# Altium PCB SmartHome V3.PcbDoc (part 3 of 3)
Units mil, origin at the board's own origin, x right, y up, seen from the top; angles counter-clockwise.
Board outline 9055.12 x 5905.51 mil, 2 copper layers (Top Layer, Bottom Layer); 247 components, 227 nets, 963 pads, 444 vias.
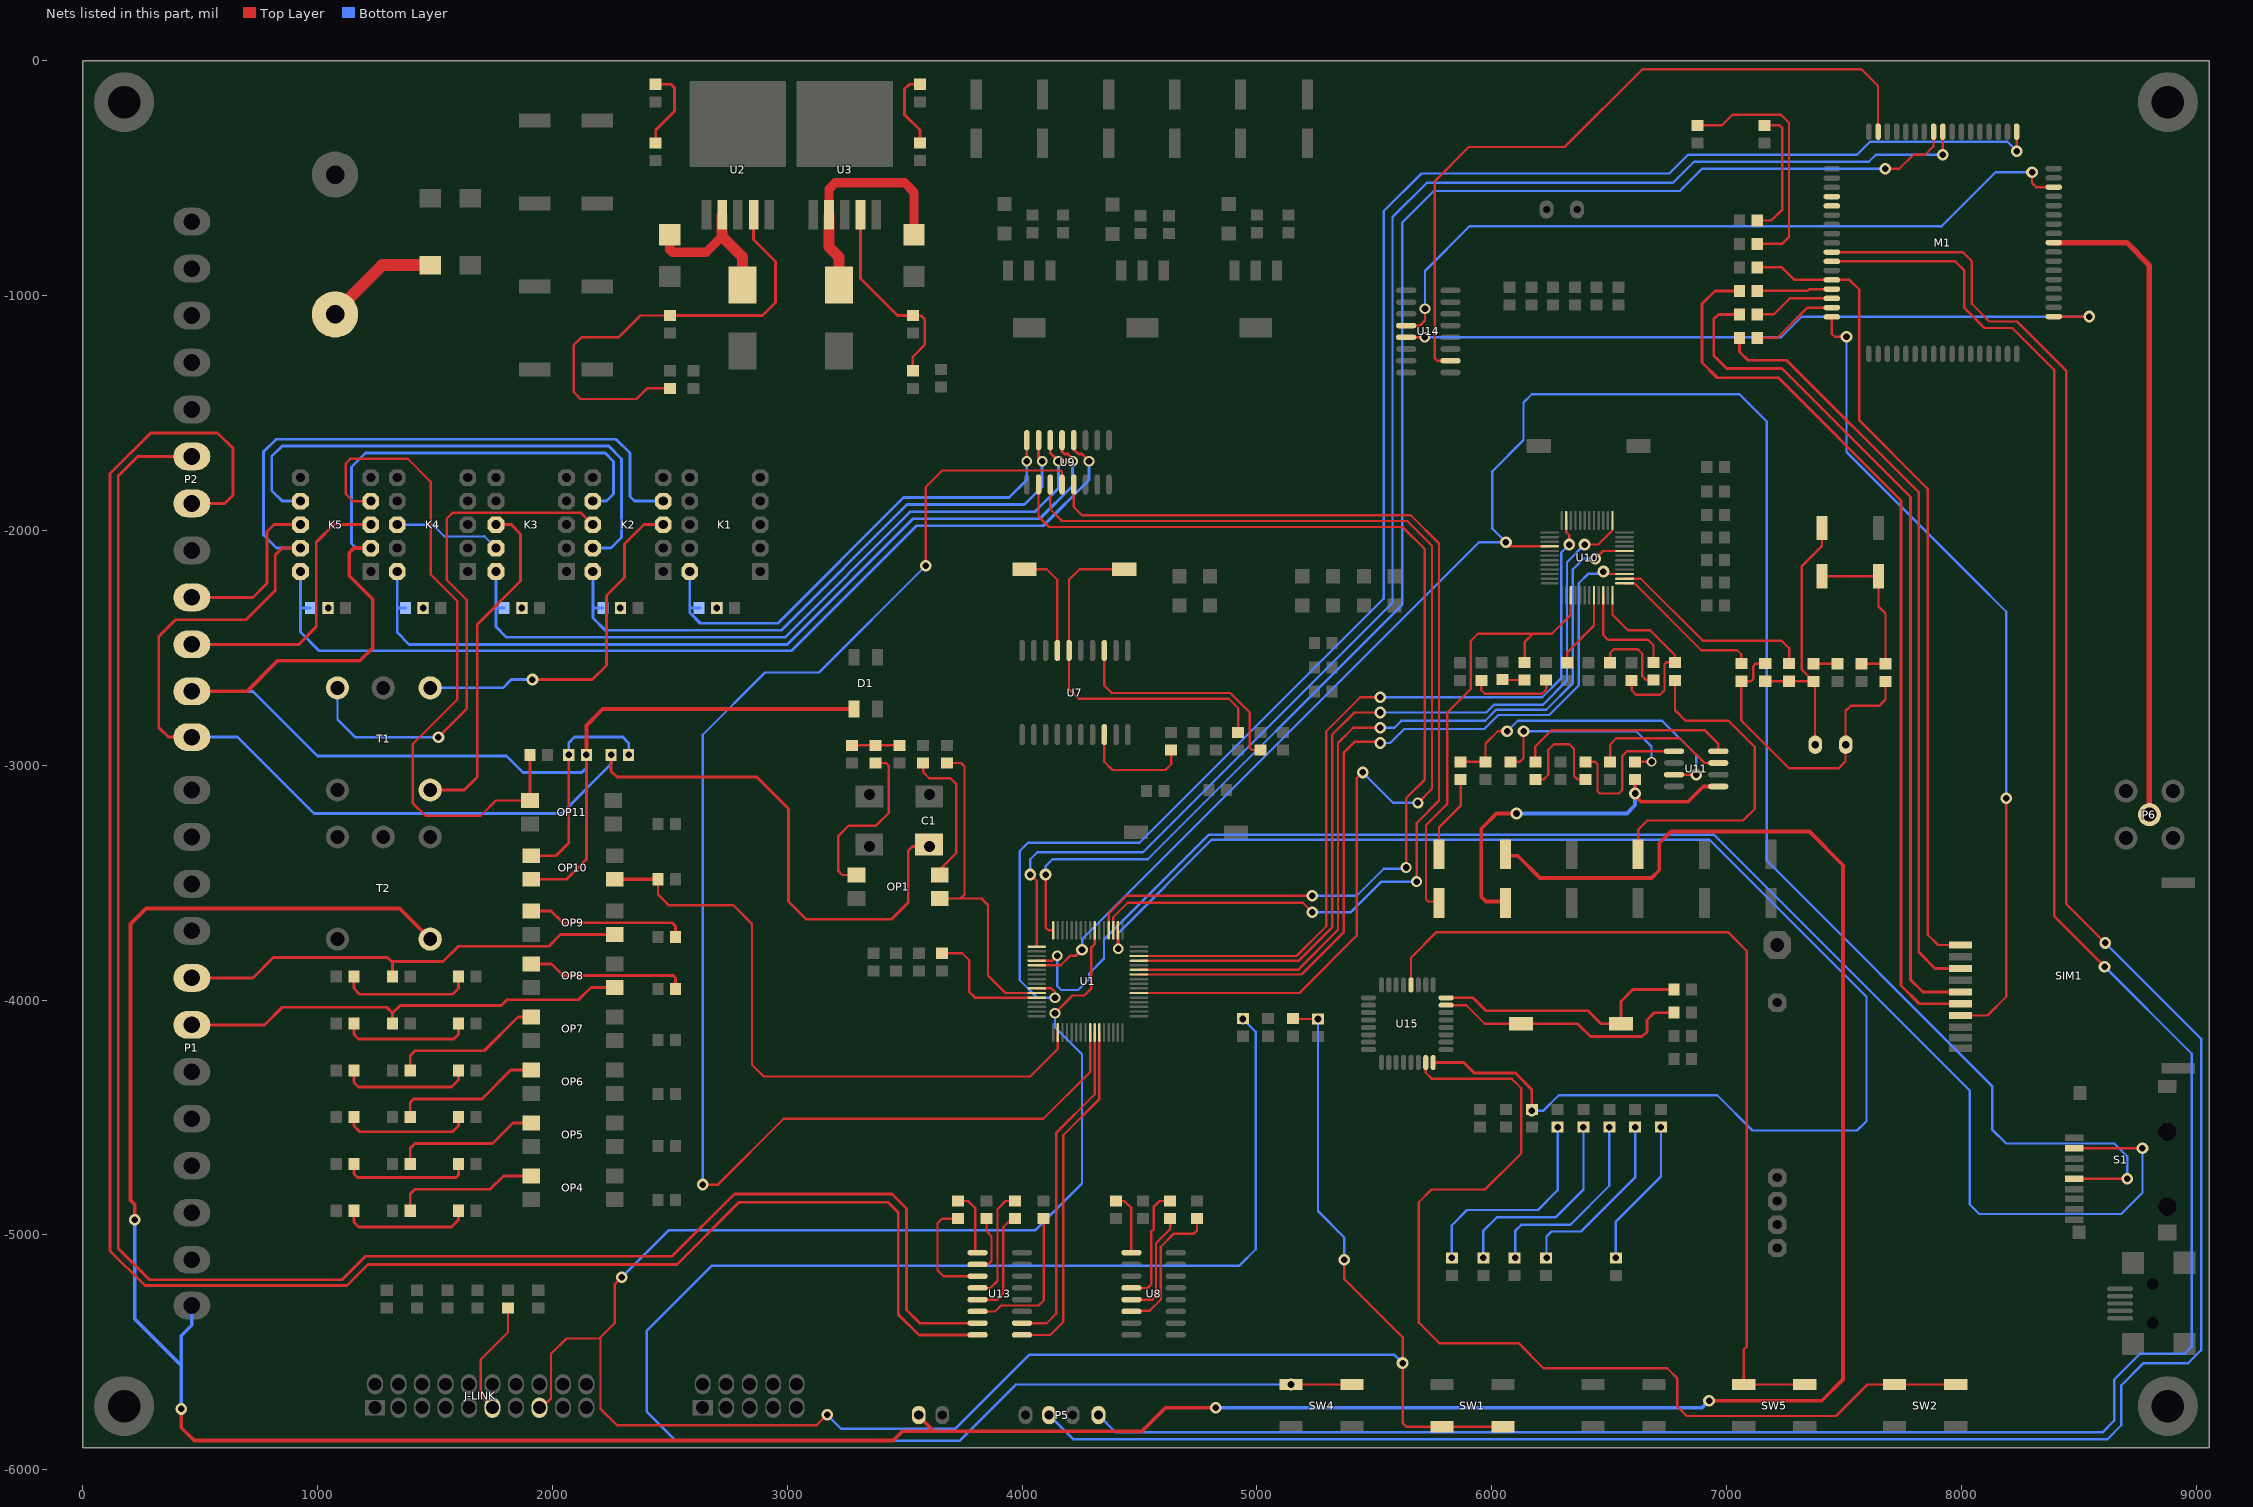
[diagram p3: the nets of this part, all layers, seen from the top]

## Via types
v1: diameter 50, hole 28, Top Layer to Bottom Layer, tented both sides, 187 vias
v2: diameter 47, hole 28, Top Layer to Bottom Layer, tented both sides, 130 vias
v3: diameter 42, hole 28, Top Layer to Bottom Layer, tented both sides, 79 vias
v4: diameter 45, hole 28, Top Layer to Bottom Layer, tented both sides, 29 vias
v5: diameter 46, hole 28, Top Layer to Bottom Layer, tented both sides, 10 vias
v6: diameter 47, hole 28, Top Layer to Bottom Layer, 4 vias
v7: diameter 35, hole 28, Top Layer to Bottom Layer, tented both sides, 3 vias
v8: diameter 48, hole 28, Top Layer to Bottom Layer, tented both sides, 1 vias
v9: diameter 44, hole 28, Top Layer to Bottom Layer, tented both sides, 1 vias

## Nets (pads, with @x,y where several pads share a name; then routed paths per layer and width w, separated by ;. In a path a pad name is that pad's centre, name@x,y a point inside that pad or via, vN(x,y) a via of type N, cw(c..) or ccw(c..) an arc to the next point about the centre after c; other vN are vias at no path point) (continued)
NetC34_2: C34.2 U8.1 | length 257.9
  Top Layer w10: C34.2@4400,-4855.51 4435,-4855.51 4465.24,-4885.76 U8.1@4465.24,-5065.93
NetC36_2: C36.2 R37.2 | length 1440.6
  Top Layer w10: C36.2@6622.8,-3385.51 6622.8,-3274.71 6662,-3235.51 7070,-3235.51 7120,-3185.51 7120,-2923.51 7007,-2810.51 6825,-2810.51 6780,-2765.51 R37.2@6780,-2637.28
NetC39_1: C39.1 R37.1 U10.48 | length 807.4
  Top Layer w10: U10.48@6513.82,-2276.69 6513.82,-2359.33 6580,-2425.51 6674,-2425.51 6780,-2531.51 6780,-2562.28 6743.23,-2562.28 6735,-2570.51 6735,-2680.51 6715,-2700.51 6615,-2700.51 6595.33,-2680.84 C39.1@6595.33,-2638.9
NetC43_2: C43.2 U10.44 | length 334.5
  Top Layer w10: C43.2@6320.9,-2563.9 6320.9,-2519.61 6435.08,-2405.43 U10.44@6435.08,-2276.69
NetC44_1: C44.1 R50.1 | length 372.7
  Top Layer w10: C44.1@5955,-2638.9 5955,-2680.51 5970,-2695.51 6215,-2695.51 6231.14,-2679.37 R50.1@6231.14,-2637.28
NetC45_1: C45.1 R51.1 | length 343.7
  Top Layer w10: C45.1@6504.06,-2563.9 6504.06,-2521.46 6520,-2505.51 6620,-2505.51 6640,-2525.51 6640,-2620.51 6656.77,-2637.28 R51.1@6688.52,-2637.28
NetC46_1: C46.1 R52.1 | length 91.6
  Top Layer w10: C46.1@6048.09,-2637.28 R52.1@6139.67,-2637.28
NetC47_2: C47.2 R53.1 | length 363.2
  Top Layer w10: C47.2@5775,-3385.51 5775,-3265.51 5867.21,-3173.3 R53.1@5867.21,-3060.51
NetC49_1: C49.1 R58.1 | length 466.1
  Top Layer w10: R58.1@6185,-3060.51 6220,-3060.51 6240,-3040.51 6240,-2935.51 6265,-2910.51 6330,-2910.51 6350,-2930.51 6350,-3045.51 6365,-3060.51 C49.1@6397.94,-3060.51
NetC49_2: C49.2 U11.1 | length 660.4
  Top Layer w10: C49.2@6397.94,-2985.51 6440,-2985.51 6450,-2995.51 6450,-3110.51 6460,-3120.51 6540,-3120.51 6555,-3105.51 6555,-2960.51 6575,-2940.51 U11.1@6775.51,-2940.51
NetC51_2: C51.2 U11.7 | length 588.8
  Top Layer w10: C51.2@6503.87,-2985.51 6503.87,-2911.64 6530,-2885.51 6800,-2885.51 6905,-2990.51 U11.7@6964.49,-2990.51
NetC52_1: C52.1 R63.1 | length 884.1
  Top Layer w10: R63.1@6079.07,-2985.51 6120,-2985.51 6135,-2970.51 v1(6135,-2855.51) ; C52.1@6610,-2985.51 v3(6680,-2985.51)
  Bottom Layer w10: v1(6135,-2855.51) 6615,-2855.51 6680,-2920.51 v3(6680,-2985.51)
NetC52_2: C52.2 C53.1 U11.5 | length 1655.5
  Top Layer w10: v1@6610,-3130.51 C52.2@6610,-3060.51
  Top Layer w16: C53.1@6034,-3580.51 5975,-3580.51 5955,-3560.51 5955,-3270.51 6020,-3205.51 v1(6105,-3205.51) ; C52.2@6610,-3060.51 v1(6610,-3120.51) 6610,-3130.51 6635,-3155.51 6835,-3155.51 6900,-3090.51 U11.5@6964.49,-3090.51
  Bottom Layer w16: v1(6105,-3205.51) 6575,-3205.51 6610,-3170.51 v1(6610,-3120.51)
NetC55_1: C55.1 U13.2 | length 265.2
  Top Layer w10: U13.2@3800.24,-5125.93 3854.58,-5125.93 3870,-5110.51 3870,-5005.51 3848.2,-4983.71 C55.1@3848.2,-4930.51
NetC56_1: C56.1 U13.3 | length 465.7
  Top Layer w10: C56.1@3726.6,-4930.51 3660,-4930.51 3640,-4950.51 3640,-5150.51 3665.42,-5175.93 U13.3@3800.24,-5175.93
NetC56_2: C56.2 U13.1 | length 276.3
  Top Layer w10: C56.2@3726.6,-4855.51 3770,-4855.51 3800.24,-4885.76 U13.1@3800.24,-5075.93
NetC57_2: C57.2 U13.6 | length 648.8
  Top Layer w9: U13.6@3810.51,-5325.51 3885,-5325.51 3910,-5300.51 4070,-5300.51 4091.6,-5278.91
  Top Layer w10: 4091.6,-5278.91 C57.2@4091.6,-4930.51
NetC58_1: C58.1 U13.4 | length 501.9
  Top Layer w10: U13.4@3800.24,-5225.93 3864.58,-5225.93 3895,-5195.51 3895,-4890.51 3930,-4855.51 C58.1@3970,-4855.51
NetC58_2: C58.2 U13.5 | length 478.6
  Top Layer w10: U13.5@3800.24,-5275.93 3894.58,-5275.93 3920,-5250.51 3920,-4967.51 3957,-4930.51 C58.2@3970,-4930.51
NetC61_1: C61.1 U15.7 X5.1 | length 1096.4
  Top Layer w10: U15.7@5805.35,-4021.77 5891.26,-4021.77 5970,-4100.51 X5.1@6115,-4100.51
  Top Layer w12: X5.1@6115,-4100.51 X5.1@6125,-4100.51 6365,-4100.51 6420,-4155.51 6640,-4155.51 6660,-4135.51 6660,-4085.51 6691.67,-4053.85 C61.1@6775,-4053.85
NetC62_1: C62.1 U15.8 X5.2 | length 1131.1
  Top Layer w12: U15.8@5805.35,-3990.28 5919.76,-3990.28 5975,-4045.51 6410,-4045.51 6465,-4100.51 X5.2@6550.2,-4100.51 6550.2,-4005.32 6600,-3955.51 C62.1@6775,-3955.51
NetC65_2: C65.2 U8.6 | length 604.6
  Top Layer w10: U8.6@4465.24,-5325.93 4468.66,-5322.51 4543,-5322.51 4590,-5275.51 4590,-5050.51 4645,-4995.51 4730,-4995.51 4745,-4980.51 C65.2@4745,-4930.51
NetC66_1: C66.1 U8.4 | length 505.7
  Top Layer w10: U8.4@4465.24,-5225.93 4534.58,-5225.93 4550,-5210.51 4550,-4985.51 4560,-4975.51 4560,-4880.51 4585,-4855.51 C66.1@4630.07,-4855.51
NetC66_2: C66.2 U8.5 | length 466
  Top Layer w10: U8.5@4465.24,-5275.93 4554.58,-5275.93 4570,-5260.51 4570,-5035.51 4630.07,-4975.45 C66.2@4630.07,-4930.51
NetC67_1: C67.1 C71.1 R80.1 R81.2 | length 726.7
  Top Layer w10: C67.1@7406,-2195.51 C71.1@7646,-2195.51 7646,-2324.51 7676,-2354.51 R80.1@7676,-2567.9 R81.2@7574.12,-2567.9
NetC67_2: C67.2 C68.2 C69.1 MIC.1@7377,-2912.51 R73.1 | length 1183.5
  Top Layer w10: C68.2@7164.08,-2642.51 C69.1@7265.76,-2642.51 R73.1@7369.97,-2642.51 ; MIC.1@7376,-2908.51 7376,-2648.54 R73.1@7370.36,-2642.9 R73.1@7369.97,-2642.51 ; C67.2@7406,-1990.51 7406,-2066.51 7319,-2153.51 7319,-2591.54 R73.1@7369.97,-2642.51
NetC68_1: C68.1 C70.1 MIC.2@7507,-2912.51 R80.2 | length 1355.8
  Top Layer w10: C68.1@7164.08,-2567.51 7123,-2567.51 7113,-2577.51 7113,-2633.51 7104,-2642.51 C70.1@7062,-2642.51 7062,-2809.51 7266,-3013.51 7476,-3013.51 7506,-2983.51 7506,-2908.51 7506,-2769.51 7528,-2747.51 7649,-2747.51 7676,-2720.51 R80.2@7676,-2642.9
NetC69_2: C69.2 U10.2 | length 888.8
  Top Layer w10: U10.2@6565,-2205.83 6634.31,-2205.83 6898.5,-2470.01 7233.5,-2470.01 7265.76,-2502.27 C69.2@7265.76,-2567.51
NetC70_2: C70.2 U10.1 | length 662.1
  Top Layer w10: U10.1@6565,-2225.51 6607,-2225.51 6892,-2510.51 7045,-2510.51 7062,-2527.51 C70.2@7062,-2567.51
NetD2_1: D2.1 F1.2 | length 497.8
  Top Layer w50: F1.2@1075,-1080.51 1075,-1070.51 1275,-870.51 D2.1@1480,-870.51
NetD4_2: D4.2 R25.1
  other v4: 2700,-2330.51
NetD5_2: D5.2 L4.1 U2.2 | length 653.7
  Top Layer w39.37: D5.2@2500,-741.93 2500,-805.51 2510,-815.51 2655,-815.51 2723.07,-747.44
  Top Layer w47.24: U2.2@2723.07,-656.81 2723.07,-747.44 2723.07,-748.58 2810,-835.51 L4.1@2810,-955.51
NetD6_2: D6.2 L5.1 U3.2 | length 996.5
  Top Layer w39.37: U3.2@3178.07,-656.81 3178.07,-547.44 3205,-520.51 3500,-520.51 3540,-560.51 D6.2@3540,-741.93
  Top Layer w47.24: U3.2@3178.07,-656.81 3178.07,-793.58 3220,-835.51 L5.1@3220,-955.51
NetD7_2: D7.2 R38.1
  other v4: 2290,-2330.51
NetD8_2: D8.2 R12.1 | length 354.4
  Top Layer w12: R12.1@2440,-350.51 2440,-295.51 2520,-215.51 2520,-115.51 2505,-100.51 D8.2@2440,-100.51
NetD9_2: D9.2 R13.1 | length 330.2
  Top Layer w12: R13.1@3565,-350.51 3565,-295.51 3500,-230.51 3500,-120.51 3520,-100.51 D9.2@3565,-100.51
NetD10_1: D10.1 R22.2 | length 916
  Bottom Layer w10: v2@5830,-5093.51 5830,-4958.51 5894.51,-4894 6196,-4894 6280,-4810 v3(6280,-4540.51)
  other v2: 5830,-5097.51
NetD11_1: D11.1 R21.2 | length 879.2
  Bottom Layer w10: v2(5964,-5096.51) 5964,-4981.51 6020.51,-4925 6271,-4925 6390,-4806 v3(6390,-4540.51)
NetD12_1: D12.1 R18.2 | length 844.9
  Bottom Layer w10: v2(6099,-5097.51) 6099,-4983.51 6125.51,-4957 6333.51,-4957 6500,-4790.51 v3(6500,-4540.51)
NetD13_1: D13.1 R20.2 | length 787
  Bottom Layer w10: v2(6233,-5097.51) 6233,-5006.51 6254,-4985.51 6380,-4985.51 6610,-4755.51 v3(6610,-4540.51)
NetD14_1: D14.1 R74.2 | length 638.9
  Bottom Layer w10: v2@6527,-5099.51 6527,-4944.51 6720,-4751.51 v3(6720,-4540.51)
  other v2: 6528,-5097.51
NetD15_2: D15.2 R39.1
  other v4: 1870,-2330.51
NetD16_2: D16.2 R44.1
  other v4: 1450,-2330.51
NetD17_2: D17.2 R66.1 | length 565.7
  Top Layer w12: D17.2@1155,-3900.51 1155,-3950.51 1180,-3975.51 1575,-3975.51 1600,-3950.51 R66.1@1600,-3900.51
NetD18_2: D18.2 R67.1 | length 558.6
  Top Layer w12: D18.2@1155,-4299.08 1155,-4350.51 1175,-4370.51 1570,-4370.51 1600,-4340.51 R67.1@1600,-4299.08
NetD19_2: D19.2 R68.1 | length 553
  Top Layer w12: D19.2@1155,-4099.8 1155,-4145.51 1175,-4165.51 1580,-4165.51 1600,-4145.51 R68.1@1600,-4099.8
NetD20_2: D20.2 R69.1 | length 540
  Top Layer w12: D20.2@1155,-4498.37 1155,-4535.51 1180,-4560.51 1575,-4560.51 1600,-4535.51 R69.1@1600,-4498.37
NetD21_2: D21.2 R70.1 | length 546.1
  Top Layer w12: D21.2@1155,-4697.65 1155,-4740.51 1170,-4755.51 1590,-4755.51 1600,-4745.51 R70.1@1600,-4697.65
NetD22_2: D22.2 R71.1 | length 552.9
  Top Layer w12: D22.2@1155,-4896.94 1155,-4945.51 1175,-4965.51 1570,-4965.51 1600,-4935.51 R71.1@1600,-4896.94
NetD23_2: D23.2 R45.1
  other v4: 1045,-2330.51
NetK2_3: K2.3 T1.3 | length 1538.1
  Top Layer w12: v1(1915,-2635.51) 2170,-2635.51 2230,-2575.51 2230,-2277.51 2307,-2200.51 2307,-2058.51 2390,-1975.51 K2.3@2472.5,-1975.51
  Bottom Layer w12: T1.3@1480,-2670.51 1790,-2670.51 1825,-2635.51 v1(1915,-2635.51)
NetK2_7: K2.7 K5.9 | length 2293.7
  Bottom Layer w12: K5.9@927.5,-1875.51 850,-1875.51 805,-1830.51 805,-1685.51 850,-1640.51 2240,-1640.51 2295,-1695.51 2295,-2030.51 2250,-2075.51 K2.7@2172.5,-2075.51
NetK2_8: K2.8 T1.4 | length 2264.5
  Top Layer w10: v1(1515,-2880.51) 1635,-2760.51 1635,-2295.51 1550,-2210.51 1550,-1950.51 1575,-1925.51 2122.5,-1925.51 K2.8@2172.5,-1975.51
  Bottom Layer w10: T1.4@1085,-2670.51 1085,-2805.51 1160,-2880.51 v1(1515,-2880.51)
NetK3_7: K3.7 K4.8 | length 461.4
  Bottom Layer w9: 1540,-2025.51 1710,-2025.51
  Bottom Layer w10: K4.8@1340,-1975.51 1490,-1975.51 1540,-2025.51 ; 1710,-2025.51 K3.7@1760,-2075.51
NetK3_8: K3.8 T1.1 | length 1456
  Top Layer w12: T1.1@1480,-3105.51 1625,-3105.51 1680,-3050.51 1680,-2400.51 1865,-2215.51 1865,-2015.51 1825,-1975.51 K3.8@1760,-1975.51
NetK5_2: K5.2 OP11.1 R78.1 | length 2898
  Top Layer w10: K5.2@1227.5,-1875.51 1150,-1875.51 1120,-1845.51 1120,-1715.51 1140,-1695.51 1384,-1695.51 1482,-1793.51 1482,-2187.51 1595,-2300.51 1595,-2720.51 1405,-2910.51 1405,-3160.51 1460,-3215.51 1695,-3215.51 1760,-3150.51 OP11.1@1905,-3150.51
  Top Layer w12: OP11.1@1905,-3150.51 R78.1@1905,-2955.51
NetNETLIGHT_2: NETLIGHT.2 R65.1 | length 1056.1
  Top Layer w10: NETLIGHT.2@6875,-275.51 6980,-275.51 7025,-230.51 7230.51,-230.51 7265,-265 7265,-751 7235.49,-780.51 R65.1@7130,-780.51
NetOP1_1: OP1.1 R3.2 | length 750
  Top Layer w10: OP1.1@3295,-3467.66 3234.65,-3467.66 3218,-3451 3218,-3301 3262,-3257 3378,-3257 3432,-3203 3432,-3002 3420.51,-2990.51 R3.2@3376.25,-2990.51
NetOP1_4: OP1.4 R4.1 | length 616.8
  Top Layer w10: R4.1@3578.75,-2990.51 3578.75,-3029.26 3605,-3055.51 3695.51,-3055.51 3719,-3079 3719,-3375 3650,-3444 OP1.4@3650,-3467.66
NetOP4_1: OP4.1 R46.2 | length 618.1
  Top Layer w12: R46.2@1395,-4896.94 1395,-4825.51 1415,-4805.51 1735,-4805.51 1791.43,-4749.08 OP4.1@1910,-4749.08
NetOP5_1: OP5.1 R47.2 | length 626.5
  Top Layer w12: R47.2@1395,-4697.65 1395,-4630.51 1415,-4610.51 1745,-4610.51 1832.14,-4523.37 OP5.1@1910,-4523.37
NetOP6_1: OP6.1 R48.2 | length 635
  Top Layer w12: R48.2@1395,-4498.37 1395,-4435.51 1410,-4420.51 1700,-4420.51 1822.86,-4297.66 OP6.1@1910,-4297.66
NetOP7_1: OP7.1 R49.2 | length 646.3
  Top Layer w12: R49.2@1395,-4299.08 1395,-4235.51 1415,-4215.51 1710,-4215.51 1853.57,-4071.94 OP7.1@1910,-4071.94
NetOP8_1: OP8.1 R56.1 | length 687.4
  Top Layer w12: OP8.1@1910,-3846.23 1995.71,-3846.23 2045,-3895.51 2515,-3895.51 2525,-3905.51 R56.1@2525,-3953.37
NetOP9_1: OP9.1 R57.1 | length 686.9
  Top Layer w12: OP9.1@1910,-3620.51 1995,-3620.51 2045,-3670.51 2510,-3670.51 2525,-3685.51 R57.1@2525,-3730.51
NetOP10_1: OP10.1 R26.1 R76.1 | length 933.5
  Top Layer w12: OP10.1@1910,-3385.51 2015,-3385.51 2070,-3330.51 v4(2070,-2955.51)
  Bottom Layer w12: v4(2070,-2955.51) 2070,-2905.51 2095,-2880.51 2300,-2880.51 2325,-2905.51 v5(2325,-2955.51)
NetR1_2: R1.2 R2.1 R3.1 | length 202.5
  Top Layer w10: R2.1@3275,-2915.51 R3.1@3376.25,-2915.51 R1.2@3477.5,-2915.51
NetR8_2: R8.2 R9.1 U2.4 | length 1985.9
  Top Layer w10: R9.1@2500,-1395.51 2403,-1395.51 2358,-1440.51 2120,-1440.51 2091,-1411.51 2091,-1211.51 2124,-1178.51 2282,-1178.51 2375,-1085.51 R8.2@2500,-1085.51
  Top Layer w12: R8.2@2500,-1085.51 2895,-1085.51 2950,-1030.51 2950,-855.51 2856.93,-762.44 U2.4@2856.93,-656.81
NetR10_2: R10.2 R11.1 U3.4 | length 856.1
  Top Layer w10: R11.1@3535,-1320.51 3535,-1260.51 3585,-1210.51 3585,-1100.51 3570,-1085.51 R10.2@3535,-1085.51
  Top Layer w12: U3.4@3311.93,-656.81 3311.93,-927.44 3470,-1085.51 R10.2@3535,-1085.51
NetR15_2: R15.2 U7.6 X1.1 | length 1575.8
  Top Layer w10: X1.1@4435,-2165.51 4245,-2165.51 4200,-2210.51 U7.6@4200,-2511.38 4200,-2675.51 4241.38,-2716.89 4879.69,-2716.89 4920,-2757.2 R15.2@4920,-2860.51
NetR16_1: R16.1 U7.3 | length 1015.4
  Top Layer w10: U7.3@4350,-2511.38 4350,-2660.51 4381.81,-2692.32 4885.97,-2692.32 4970,-2776.36 4970,-2925.51 4980,-2935.51 R16.1@5015,-2935.51
NetR17_2: R17.2 U1.28 | length 559.8
  Top Layer w10: R17.2@3660,-3800.51 3745,-3800.51 3775,-3830.51 3775,-3965.51 3798.9,-3989.41 U1.28@4062.48,-3989.41
NetR19_1: R19.1 SW4.2 | length 7237.3
  Top Layer w10: v1(5145,-5636.61) SW4.2@5405,-5636.61
  Bottom Layer w10: v2(4940,-4080.51) 4995,-4135.51 4995,-5060.51 4925,-5130.51 2680,-5130.51 2401.38,-5409.13 2401.38,-5751.89 2525,-5875.51 3735,-5875.51 3973.9,-5636.61 v1(5145,-5636.61)
NetR23_2: R23.2 U7.18 | length 485.7
  Top Layer w10: U7.18@4350,-2869.65 4350,-2985.51 4385,-3020.51 4610,-3020.51 4635,-2995.51 R23.2@4635,-2935.51
NetR51_2: R51.2 U10.46 | length 473.8
  Top Layer w10: U10.46@6474.45,-2276.69 6474.45,-2444.96 6495,-2465.51 6665,-2465.51 6688.52,-2489.03 R51.2@6688.52,-2562.28
NetR53_2: R53.2 R54.1 U11.3 | length 1360.6
  Top Layer w10: R53.2@5867.21,-2985.51 R54.1@5973.14,-2985.51 5973.14,-2907.37 6025,-2855.51 v1(6065,-2855.51) ; U11.3@6775.51,-3040.51 v1(6870,-3040.51)
  Bottom Layer w10: v1(6065,-2855.51) 6110,-2810.51 6725,-2810.51 6870,-2955.51 v1(6870,-3040.51)
NetR55_1: R55.1 SIM1.6 | length 3873.2
  Top Layer w12: R55.1@7055,-980.51 6950,-980.51 6895,-1035.51 6895,-1285.51 6960,-1350.51 7220,-1350.51 7742,-1872.51 7742,-3937.51 7820,-4015.51 SIM1.6@7995,-4015.51
NetR58_2: R58.2 U11.8 | length 928.6
  Top Layer w10: R58.2@6185,-2985.51 6185,-2920.51 6255,-2850.51 6905,-2850.51 6964.49,-2910 U11.8@6964.49,-2940.51
NetR59_2: R59.2 SIM1.5 | length 3649.6
  Top Layer w12: R59.2@7055,-1080.51 6965,-1080.51 6945,-1100.51 6945,-1255.51 7000,-1310.51 7235,-1310.51 7783,-1858.51 7783,-3913.51 7835,-3965.51 SIM1.5@7995,-3965.51
NetR60_2: R60.2 SIM1.3 | length 3234.3
  Top Layer w12: R60.2@7055,-1180.51 7055,-1240.51 7090,-1275.51 7255,-1275.51 7818,-1838.51 7818,-3796.51 7887,-3865.51 SIM1.3@7995,-3865.51
NetR64_1: R64.1 STATUS.2 | length 554.4
  Top Layer w10: R64.1@7130,-680.51 7190,-680.51 7237,-633.51 7237,-287.51 7225,-275.51 STATUS.2@7160,-275.51
NetR72_1: R72.1 R73.2 | length 101.9
  Top Layer w10: R73.2@7370.36,-2567.9 R72.1@7472.24,-2567.9
NetU7_7: U7.7 X1.2 | length 459.7
  Top Layer w10: X1.2@4009.8,-2165.51 4105,-2165.51 4150,-2210.51 U7.7@4150,-2511.38
NRST: C30.1 J-LINK.15 R75.1 SW1.1 U1.7 | length 10567.8
  Top Layer w10: J-LINK.15@1945,-5735.51 1955,-5735.51 1994.48,-5696.03 1994.48,-5506.03 2060,-5440.51 2200,-5440.51 2265,-5375.51 ; v1(2295,-5180.51) 2265,-5210.51 2265,-5375.51 ; v1(3170,-5765.51) 3125,-5810.51 2275,-5810.51 2205,-5740.51 2205,-5435.51 2265,-5375.51 ; v4(4140,-4055.51) 4215,-3980.51 4265,-3980.51 4295,-3950.51 4295,-3775.51 4309.53,-3760.98 U1.7@4309.53,-3702.99 ; R75.1@5155.96,-4080.51 v2(5260,-4080.51) ; v1(5372,-5105.51) 5372,-5187.51 5620,-5435.51 v1(5620,-5545.51) 5620,-5800.51 5636.1,-5816.61 SW1.1@5787.5,-5816.61 SW1.1@6047.5,-5816.61
  Bottom Layer w10: v1(2295,-5180.51) 2495,-4980.51 4055,-4980.51 4255,-4780.51 4255,-4230.51 4140,-4115.51 v4(4140,-4055.51) ; v1(3170,-5765.51) 3230,-5825.51 3715,-5825.51 4030,-5510.51 5585,-5510.51 v1(5620,-5545.51) ; v2(5260,-4080.51) 5260,-4898.51 5372,-5010.51 v1(5372,-5105.51)
ON_OFF: SW2.1 U15.31 | length 4365.1
  Top Layer w10: 5718.74,-4309.25 5745,-4335.51 6085,-4335.51 6125,-4375.51 6125,-4652.51 5971,-4806.51 5743.28,-4806.51 5689,-4860.8 5689,-5373.23 5776.28,-5460.51 6113.28,-5460.51 6220.28,-5567.51 6747,-5567.51 6790,-5610.51 6790,-5730.51 6830,-5770.51 7465,-5770.51 7598.9,-5636.61 SW2.1@7715,-5636.61 SW2.1@7975,-5636.61
  Top Layer w12: 5718.74,-4309.25 U15.31@5718.74,-4265.87
OUT_Q1: OP9.3 P1.5 R62.2 | length 1957.8
  Top Layer w12: P1.5@465,-3905.51 725,-3905.51 812,-3818.51 1298,-3818.51 1315,-3835.51 ; R62.2@1320,-3900.51 1320,-3840.51 1315,-3835.51 ; OP9.3@2265,-3720.51 2035,-3720.51 1985,-3770.51 1600,-3770.51 1535,-3835.51 1315,-3835.51
OUT_Q2: OP8.3 P1.6 R61.2 | length 1931
  Top Layer w12: P1.6@465,-4105.51 775,-4105.51 850,-4030.51 1295,-4030.51 1320,-4055.51 ; R61.2@1320,-4099.8 1320,-4055.51 ; OP8.3@2265,-3946.23 2164.29,-3946.23 2112,-3998.51 1807,-3998.51 1782.38,-4023.13 1352.38,-4023.13 1320,-4055.51
PHONE_IRQ: OP10.3 R77.1 U1.34 | length 2743.5
  Top Layer w10: R77.1@2450,-3485.51 2450,-3550.51 2495,-3595.51 2770,-3595.51 2850,-3675.51 2850,-4275.51 2900,-4325.51 4035,-4325.51 4152.05,-4208.46 U1.34@4152.05,-4138.03
  Top Layer w16: OP10.3@2265,-3485.51 R77.1@2450,-3485.51
PHONE_RING: K5.8 P2.9 | length 719.8
  Top Layer w12: P2.9@465,-2285.51 725,-2285.51 785,-2225.51 785,-2005.51 815,-1975.51 K5.8@927.5,-1975.51
PHONE_TIP: K5.3 P2.10 | length 1184.6
  Top Layer w12: P2.10@465,-2485.51 920,-2485.51 995,-2410.51 995,-2050.51 1070,-1975.51 K5.3@1227.5,-1975.51
PLC_RX_RS232: P2.6 U13.7 | length 7972
  Top Layer w12: P2.6@465,-1685.51 235,-1685.51 152,-1768.51 152,-5057.51 285,-5190.51 1105,-5190.51 1205,-5090.51 2510,-5090.51 2775,-4825.51 3446.51,-4825.51 3508,-4887 3508,-5319 3564.93,-5375.93 U13.7@3800.24,-5375.93
PLC_RX_TTL: U1.43 U13.9 | length 1474.1
  Top Layer w10: U13.9@4020.24,-5425.93 4119.58,-5425.93 4175,-5370.51 4175,-4575.51 4329.21,-4421.3 U1.43@4329.21,-4138.03
PLC_TX_RS232: P2.7 U13.8 | length 8700.1
  Top Layer w12: P2.7@465,-1885.51 605,-1885.51 640,-1850.51 640,-1650.51 575,-1585.51 290,-1585.51 117,-1758.51 117,-5067.51 265,-5215.51 1125,-5215.51 1215,-5125.51 2530,-5125.51 2795,-4860.51 3429.51,-4860.51 3473,-4904 3473,-5338 3560.93,-5425.93 U13.8@3800.24,-5425.93
PLC_TX_TTL: U1.42 U13.10 | length 1407.1
  Top Layer w10: U13.10@4020.24,-5375.93 4104.58,-5375.93 4145,-5335.51 4145,-4565.51 4309.53,-4400.98 U1.42@4309.53,-4138.03
RELAY_BUSY: K2.1 R38.2 U9.15 | length 2632.6
  Top Layer w12: U9.15@4070,-1616.02 4070,-1690.51 v4(4085,-1705.51)
  Bottom Layer w12: K2.1@2172.5,-2175.51 2172.5,-2330.51 ; R38.2@2215,-2330.51 2172.5,-2330.51 ; v4(4085,-1705.51) 4085,-1815.51 4010,-1890.51 3510,-1890.51 2975,-2425.51 2225,-2425.51 2172.5,-2373.01 2172.5,-2330.51
RELAY_CALL: K3.1 R39.2 U9.14 | length 3165.7
  Top Layer w12: U9.14@4120,-1616.02 4120,-1670.51 v4(4155,-1705.51)
  Bottom Layer w12: K3.1@1760,-2175.51 1760,-2330.51 ; R39.2@1795,-2330.51 1760,-2330.51 ; v4(4155,-1705.51) 4155,-1820.51 4055,-1920.51 3525,-1920.51 2990,-2455.51 1805,-2455.51 1760,-2410.51 1760,-2330.51
RELAY_INTERCOM: K5.1 R45.2 U9.12 | length 4191.7
  Top Layer w12: U9.12@4220,-1616.02 4220,-1655.36 4240.08,-1675.43 4254.92,-1675.43 v4(4285,-1705.51)
  Bottom Layer w12: K5.1@927.5,-2175.51 927.5,-2433.01 1007,-2512.51 3018,-2512.51 3550,-1980.51 4090,-1980.51 4285,-1785.51 v4(4285,-1705.51) ; 932.5,-2330.51 R45.2@970,-2330.51
RELAY_POWER: K1.1 R25.2 U9.16 | length 2097.9
  Top Layer w12: v4(4020,-1705.51) U9.16@4020,-1616.02
  Bottom Layer w12: K1.1@2585,-2175.51 2585,-2325.51 ; R25.2@2630,-2330.51 R25.2@2625,-2330.51 2590,-2330.51 2585,-2325.51 ; v4(4020,-1705.51) 4020,-1785.51 3945,-1860.51 3495,-1860.51 2960,-2395.51 2630,-2395.51 2585,-2350.51 2585,-2325.51
RELAY_RECORD: K4.1 R44.2 U9.13 | length 3690.1
  Top Layer w12: U9.13@4170,-1616.02 4170,-1665.51 4180,-1675.51 4195,-1675.51 4210,-1690.51 4210,-1705.51 v4(4215,-1705.51)
  Bottom Layer w12: K4.1@1340,-2175.51 1340,-2435.51 1390,-2485.51 3000,-2485.51 3535,-1950.51 4075,-1950.51 4215,-1810.51 v4(4215,-1705.51) ; 1345,-2330.51 R44.2@1375,-2330.51
RIGHT: C47.1 R52.2 U10.39 | length 1929.3
  Top Layer w10: C47.1@5775,-3580.51 5730,-3580.51 5720,-3570.51 5720,-3255.51 5810,-3165.51 5810,-2775.51 5910,-2675.51 5910,-2470.51 5940,-2440.51 6175,-2440.51 ; R52.2@6139.67,-2562.28 6139.67,-2475.85 6175,-2440.51 ; U10.39@6336.65,-2276.69 6336.65,-2358.86 6255,-2440.51 6175,-2440.51
RING: D1.4 K2.9 K5.4 OP10.2 P2.11 R76.2 | length 7100.1
  Top Layer w12: OP10.2@1910,-3485.51 2060,-3485.51 2145,-3400.51 v5(2145,-2955.51)
  Top Layer w16: P2.11@465,-2685.51 700,-2685.51 830,-2555.51 1180,-2555.51 1235,-2500.51 1235,-2293.51 1135,-2193.51 1135,-2095.51 1155,-2075.51 K5.4@1227.5,-2075.51 ; v5(2145,-2955.51) 2145,-2830.51 2215,-2760.51 D1.4@3285,-2760.51
  Bottom Layer w12: P2.11@465,-2685.51 725,-2685.51 1000,-2960.51 1805,-2960.51 1875,-3030.51 2125,-3030.51 2145,-3010.51 v5(2145,-2955.51) ; K5.4@1227.5,-2075.51 1165,-2075.51 1145,-2055.51 1145,-1730.51 1205,-1670.51 2225,-1670.51 2261,-1706.51 2261,-1844.51 2230,-1875.51 K2.9@2172.5,-1875.51
RING_DETECT: OP1.3 R5.2 U1.27 | length 1405.2
  Top Layer w10: OP1.3@3650,-3567.66 3737.86,-3567.66 ; R5.2@3680,-2990.51 3740,-2990.51 3755,-3005.51 3755,-3550.51 3737.86,-3567.66 ; U1.27@4062.48,-3969.72 3929.21,-3969.72 3855,-3895.51 3855,-3595.51 3827.14,-3567.66 3737.86,-3567.66
RTCK: J-LINK.11 R29.1 | length 493.8
  Top Layer w10: J-LINK.11@1745,-5735.51 1695,-5685.51 1695,-5530.51 1811,-5414.51 R29.1@1811,-5310.51
SCK: S1.5 U1.21 U10.28 | length 9091.5
  Top Layer w10: U1.21@4062.48,-3851.61 4164.9,-3851.61 4206,-3810.51 4230,-3810.51 v1(4255,-3785.51) ; v1(6060,-2050.51) 6077.52,-2068.03 U10.28@6246.1,-2068.03 ; S1.5@8480,-4760.51 v1(8705,-4760.51)
  Bottom Layer w10: v1@4265,-3785.51 4256,-3776.51 4256,-3740.51 5946,-2050.51 v1(6060,-2050.51) 6002.5,-1993.01 6002.5,-1748.01 6135,-1615.51 6135,-1455.51 6170,-1420.51 7054,-1420.51 7171,-1537.51 7171,-3406.51 8130,-4365.51 8130,-4550.51 8190,-4610.51 8650,-4610.51 8705,-4665.51 v1(8705,-4760.51)
SIM-ANTEN: M1.60 P6.1 | length 2786.6
  Top Layer w23.5: M1.60@8392.44,-774.9 8703.39,-774.9 8800,-871.51 P6.1@8800,-3210.51
SIM-CLK: M1.32 R59.1 | length 345.8
  Top Layer w10: R59.1@7130,-1080.51 7200,-1080.51 7268.17,-1012.34 M1.32@7447.56,-1012.34
SIM-DATA: M1.31 R55.2 | length 320.8
  Top Layer w10: R55.2@7130,-980.51 7345,-980.51 7352.74,-972.78 M1.31@7447.56,-972.78
SIM-DBG-RXD: M1.28 P5.4 | length 10572.4
  Top Layer w10: M1.28@7447.56,-854.86 7973.35,-854.86 8012,-893.51 8012,-1053.51 8097,-1138.51 8216,-1138.51 8394,-1316.51 8394,-3642.51 v1(8609,-3857.51)
  Bottom Layer w10: P5.4@4325,-5766.61 4398.9,-5840.51 8600,-5840.51 8650,-5790.51 8650,-5615.51 8760,-5505.51 8950,-5505.51 8980,-5475.51 8980,-4228.51 v1(8609,-3857.51)
SIM-DBG-TXD: M1.27 P5.2 | length 10927
  Top Layer w10: M1.27@7447.56,-815.49 8005,-815.51 8043,-853.51 8043,-1035.51 8118,-1110.51 8236,-1110.51 8445,-1319.51 8445,-3589.51 v1(8612,-3756.51)
  Bottom Layer w10: P5.2@4115,-5766.61 4218.9,-5870.51 8620,-5870.51 8680,-5810.51 8680,-5640.51 8775,-5545.51 8965,-5545.51 9020,-5490.51 9020,-4164.51 v1(8612,-3756.51)
SIM-NETLIGHT: M1.52 U14.5 | length 3094.8
  Top Layer w10: U14.5@5635.02,-1178 v4(5714.51,-1178) ; M1.52@8392.44,-1089.86 v1(8543.35,-1089.86)
  Bottom Layer w10: v4(5714.51,-1178) 7232,-1178 7319.49,-1090.51 v1@8542.7,-1090.51
SIM-POWER: M1.1 U1.26 | length 7403
  Top Layer w10: U1.26@4062.48,-3950.04 4125.53,-3950.04 4140,-3964.51 v4(4140,-3990.51) ; M1.1@8234.21,-302.46 8235,-303.25 v1(8235,-385.51)
  Bottom Layer w10: v4(4140,-3990.51) 4065,-3990.51 3990,-3915.51 3990,-3365.51 4025,-3330.51 4500,-3330.51 5540,-2290.51 5540,-640.51 5700,-480.51 6755,-480.51 6835,-400.51 7555,-400.51 7610,-345.51 8195,-345.51 v1(8235,-385.51)
SIM-PRESENCE: M1.34 SIM1.7 | length 3459.4
  Top Layer w10: M1.34@7447.56,-1091.08 7447.56,-1163.07 7460,-1175.51 v1(7510,-1175.51) ; SIM1.7@7995,-4065.51 8110,-4065.51 8190,-3985.51 v1(8190,-3140.51)
  Bottom Layer w10: v1(7510,-1175.51) 7510,-1666.51 8055.31,-2211.82 8190,-2346.51 v1(8190,-3140.51)
SIM-RESET: M1.16 U14.10 | length 3134.5
  Top Layer w10: U14.10@5824,-1278 5767.02,-1278 5757.51,-1268.49 5757.51,-512.49 5902,-368 6310,-368 6641,-37 7574,-37 7644.41,-107.41 M1.16@7644.41,-302.46
SIM-RST: M1.33 R60.1 | length 370.9
  Top Layer w10: R60.1@7130,-1180.51 7215,-1180.51 7343.8,-1051.71 M1.33@7447.56,-1051.71
SIM-RXD: M1.10 U1.16 | length 6363.8
  Top Layer w10: v1(4100,-3465.51) 4100,-3690.51 4112.48,-3702.99 U1.16@4132.36,-3702.99 ; v1(7675,-460.51) 7735,-460.51 7795,-400.51 7845,-400.51 7880.63,-364.88 M1.10@7880.63,-302.46
  Bottom Layer w10: v1(4100,-3465.51) 4100,-3430.51 4130,-3400.51 4535,-3400.51 5618,-2317.51 5618,-690 5752.49,-555.51 6800,-555.51 6895,-460.51 v1(7675,-460.51)
SIM-STATUS: M1.66 U14.4 | length 3204.1
  Top Layer w10: U14.4@5635.02,-1128 5694.51,-1128 5715.51,-1107 v4(5715.51,-1056.49) ; v1(8300,-475.51) 8300,-520.51 8318.17,-538.68 M1.66@8392.44,-538.68
  Bottom Layer w10: v4(5715.51,-1056.49) 5715.51,-895.49 5905.49,-705.51 7915,-705.51 8145,-475.51 v1(8300,-475.51)
SIM-TXD: M1.9 U1.17 | length 6571.6
  Top Layer w10: v1(4035,-3465.51) 4062.48,-3492.99 U1.17@4062.48,-3772.87 ; v1(7920,-400.51) M1.9@7920,-302.46
  Bottom Layer w10: v1(4035,-3465.51) 4035,-3400.51 4065,-3370.51 4515,-3370.51 5577,-2308.51 5577,-666 5722.49,-520.51 6770.49,-520.51 6860.49,-430.51 7605,-430.51 7635,-400.51 v1(7920,-400.51)
SIM-VDD: C54.1 M1.30 SIM1.1 | length 3498.1
  Top Layer w10: C54.1@7130,-880.51 7235,-880.51 7288.09,-933.6 M1.30@7447.56,-933.6 7523.09,-933.6 7565,-975.51 7565,-1532.51 7856,-1823.51 7856,-3721.51 7900,-3765.51 SIM1.1@7995,-3765.51
SOUND_OUT: C53.2 P7.1 T2.1 | length 15226.4
  Top Layer w16: v1(222,-4935.51) 222,-4870 204,-4852 204,-3676 269.49,-3610.51 1350,-3610.51 T2.1@1480,-3740.51 ; v1(420,-5740.51) 420,-5820.51 475,-5875.51 3451.1,-5875.51 3491.1,-5835.51 3625,-5835.51 ; P7.1@3560,-5766.61 3560,-5770.51 3625,-5835.51 ; v1(4825,-5735.51) 4610,-5735.51 4510,-5835.51 3625,-5835.51 ; C53.2@6057.6,-3385.51 6110,-3385.51 6205,-3480.51 6680,-3480.51 6713,-3447.51 6713,-3332.51 6763.12,-3282.39 7351.88,-3282.39 7495,-3425.51 7495,-5615.51 7405,-5705.51 v1(6925,-5705.51)
  Bottom Layer w16: v1(222,-4935.51) 222,-5357.51 420,-5555.51 v1(420,-5740.51) 420,-5429 465,-5384 465,-5300.51 ; v1(4825,-5735.51) 6895,-5735.51 v1(6925,-5705.51)
SPK_N: M1.22
SPK_P: M1.21
SS: S1.1 U1.20 | length 6659.8
  Top Layer w10: U1.20@4062.48,-3831.93 4128.58,-3831.93 v4(4150,-3810.51) ; S1.1@8480,-4630.51 v1(8770,-4630.51)
  Bottom Layer w10: v4(4150,-3810.51) 4150,-3940.51 4166.81,-3957.32 4239.03,-3957.32 4285,-3911.36 4285,-3887.51 4349,-3823.51 4349,-3741.51 4793.19,-3297.32 4794.03,-3297.32 4795.85,-3295.51 6945,-3295.51 8035,-4385.51 8035,-4870.51 8075,-4910.51 8680,-4910.51 8770,-4820.51 v1(8770,-4630.51)
STM32_TO_M8: R7.1 U1.2 U15.32 | length 6392.1
  Top Layer w10: v4@4400,-3780.51 v4(4410,-3780.51) ; 4407.95,-3757.56 U1.2@4407.95,-3702.99
  Top Layer w12: U15.32@5750.24,-4265.87 5880.35,-4265.87 5925,-4310.51 6100,-4310.51 6170,-4380.51 R7.1@6170,-4465.51 v1(6170,-4470.51)
  Bottom Layer w10: v4@4400,-3780.51 v4(4410,-3780.51) 4410,-3714.01 4806.69,-3317.32 6926.81,-3317.32 7595,-3985.51 7595,-4515.51 7555,-4555.51 7110,-4555.51 6960,-4405.51 6285,-4405.51 6220,-4470.51 v1(6170,-4470.51)
  Bottom Layer w12: v1@6165,-4475.51 v1(6170,-4470.51)
STM_RELAY_BUSY: U1.4 U9.2 | length 4645.5
  Top Layer w10: U9.2@4070,-1805 4070,-1940.51 4115,-1985.51 5620,-1985.51 5715,-2080.51 5715,-3060.51 5635,-3140.51 v2(5635,-3435.51) ; U1.4@4368.58,-3702.99 4368.58,-3631.93 4445,-3555.51 v1(5235,-3555.51)
  Bottom Layer w10: v1(5235,-3555.51) 5425,-3555.51 5540,-3440.51 5630,-3440.51 v2(5635,-3435.51)
STM_RELAY_CALL: U1.54 U9.3 | length 4937.4
  Top Layer w10: U9.3@4120,-1805 4120,-1910.51 4170,-1960.51 5640,-1960.51 5745,-2065.51 5745,-3100.51 v2(5685,-3160.51) ; U1.54@4497.52,-3969.72 5180.79,-3969.72 5425,-3725.51 5425,-3055.51 v1(5450,-3030.51)
  Bottom Layer w10: v1(5450,-3030.51) 5580,-3160.51 v2(5685,-3160.51)
STM_RELAY_INTERCOM: U1.3 U9.5 | length 4637.5
  Top Layer w10: U9.5@4220,-1805 4220,-1900.51 4255,-1935.51 5655,-1935.51 5775,-2055.51 5775,-3150.51 5680,-3245.51 v2(5680,-3495.51) ; U1.3@4388.27,-3702.99 4388.27,-3647.24 4450,-3585.51 5195,-3585.51 v1(5235,-3625.51)
  Bottom Layer w10: v1(5235,-3625.51) 5400,-3625.51 5530,-3495.51 v2(5680,-3495.51)
STM_RELAY_RECORD: U1.41 U9.4 | length 6180
  Top Layer w10: v1(2640,-4785.51) 2705,-4785.51 2985,-4505.51 4090,-4505.51 4289.84,-4305.67 U1.41@4289.84,-4138.03 ; v1(3590,-2150.51) 3590,-1815.51 3660,-1745.51 4165,-1745.51 4170,-1750.51 U9.4@4170,-1805
  Bottom Layer w10: v1(2640,-4785.51) 2640,-2870.51 2905,-2605.51 3135,-2605.51 v1(3590,-2150.51)
TEST: SW5.1 U15.12 | length 3734.3
  Top Layer w10: U15.12@5655.75,-3935.16 5655.75,-3819.76 5765,-3710.51 7005,-3710.51 7085,-3790.51 7085,-4305.51 7085,-5475.51 7072.5,-5488.01 SW5.1@7072.5,-5636.61 SW5.1@7332.5,-5636.61
TIP: C1.2 K2.2 K5.7 P2.12 R26.2 | length 8091.9
  Top Layer w12: P2.12@465,-2880.51 365,-2880.51 324,-2839.51 324,-2451.51 395,-2380.51 695,-2380.51 820,-2255.51 820,-2105.51 850,-2075.51 K5.7@927.5,-2075.51 ; v5(2250,-2955.51) 2250,-3025.51 2275,-3050.51 2870,-3050.51 3005,-3185.51 3005,-3580.51 3080,-3655.51 3445,-3655.51 3515,-3585.51 3515,-3364.51 3534,-3345.51 C1.2@3605,-3345.51
  Bottom Layer w12: P2.12@465,-2880.51 660,-2880.51 985,-3205.51 2040,-3205.51 2250,-2995.51 v5(2250,-2955.51) ; K5.7@927.5,-2075.51 825,-2075.51 770,-2020.51 770,-1665.51 823,-1612.51 2272,-1612.51 2330,-1670.51 2330,-1855.51 2350,-1875.51 K2.2@2472.5,-1875.51
VS1003_DREQ: U1.59 U10.8 | length 3556.1
  Top Layer w10: U1.59@4497.52,-3871.3 5174.21,-3871.3 5345,-3700.51 5345,-2905.51 5410,-2840.51 v1(5525,-2840.51) ; v1(6440,-2120.51) 6472.8,-2087.72 U10.8@6565,-2087.72
  Bottom Layer w10: v1(5525,-2840.51) 5585,-2840.51 5615,-2810.51 5971.69,-2810.51 6018.07,-2764.13 6231.38,-2764.13 6345,-2650.51 6345,-2165.51 6390,-2120.51 v1(6440,-2120.51)
VS1003_XCS: U1.62 U10.23 | length 3475.8
  Top Layer w10: U1.62@4497.52,-3812.24 5168.27,-3812.24 5295,-3685.51 5295,-2855.51 5440,-2710.51 v1(5525,-2710.51) ; U10.23@6316.97,-1957.8 6316.97,-2007.48 6330,-2020.51 v1(6330,-2060.51)
  Bottom Layer w10: v1(5525,-2710.51) 6215,-2710.51 6295,-2630.51 6295,-2095.51 v1(6330,-2060.51) v1@6340,-2060.51
VS1003_XDCS: U1.61 U10.13 | length 3593
  Top Layer w10: U1.61@4497.52,-3831.93 5178.58,-3831.93 5320,-3690.51 5320,-2870.51 5415,-2775.51 v1(5525,-2775.51) ; v1(6395,-2060.51) 6453,-2060.51 6513.82,-1999.69 U10.13@6513.82,-1957.8
  Bottom Layer w10: v1(5525,-2775.51) 5975.85,-2775.51 6009.03,-2742.32 6217.63,-2742.32 6320,-2639.96 6320,-2135.51 v1(6395,-2060.51)
VS1003_XRESET: U1.58 U10.3 | length 3506.6
  Top Layer w10: U1.58@4497.52,-3890.98 5189.53,-3890.98 5370,-3710.51 5370,-2945.51 5415,-2900.51 5525,-2900.51 v1(5525,-2905.51) ; v1(6475,-2175.51) 6485.63,-2186.14 U10.3@6565,-2186.14
  Bottom Layer w10: v1(5525,-2905.51) 5567.5,-2905.51 5627.5,-2845.51 5967.54,-2845.51 6027.1,-2785.94 6244.57,-2785.94 6370,-2660.51 6370,-2225.51 6410,-2185.51 6465,-2185.51 v1(6475,-2175.51) v1@6465,-2165.51
pads on no net: CN1.2 CN1.4 CN1.6 CN1.9 J-LINK.17 K1.4 K1.5 K1.6 K1.7 K2.5 K2.6 K3.2 K3.3 K3.4 K3.5 K3.6 K4.2 K4.3 K4.4 K4.5 K4.6 K5.5 K5.6 M1.2 M1.3 M1.4 M1.5 M1.6 M1.7 M1.8 M1.11 M1.12 M1.13 M1.14 M1.15 M1.25 M1.26 M1.35 M1.36 M1.37 M1.38 M1.40 M1.41 M1.42 M1.43 M1.44 M1.47 M1.48 M1.49 M1.50 M1.51 M1.67 M1.68 P1.3 P1.4 P1.11 P1.12 P2.5 P3. P3.1 P3.2 P3.4 S1. S1.8 S1.9 S1.10 SIM1.4 SIM1.9 SIM1.10 T1. T2. U1.1 U2.6 U3.6 U4.4 U5.4 U6.4 U8.11 U8.12 U8.13 U8.14 U9.6 U9.7 U9.10 U9.11 U10.9 U10.10 U10.11 U10.12 U10.15 U10.25 U10.27 U10.33 U10.34 U10.35 U10.36 U13.11 U13.12 U13.13 U13.14 U14.1 U14.2 U14.3 U14.6 U14.11 U14.14 U14.15 U14.16 U15.13 U15.19 U15.20 U15.22
copper on no net: | length 535
  Top Layer w10: 8320.15,-755.51 ccw(c8235,-755.51) 8320.15,-755.51
  other v1: 2045,-4110.51

## Polygon pours and split planes (outlines as drawn)
GND on Top Layer "TOP-No Net" (solid, pour order 4): 5,-5.51 9050,-5.51 9050,-5900.51 5,-5900.51
GND on Bottom Layer "TOP-No Net" (solid, pour order 6): 5,-5.51 9050,-5.51 9050,-5900.51 5,-5900.51

## Keep-outs
Keep-Out Layer:
  lines w11.81: 5,-177 5,-5728.51 ccw(c177,-5728.51) 177,-5900.51 8878.12,-5900.51 ; 5.51,-177 cw(c177,-177) 177,-5.51 8888.91,-5.51 ; 8878.12,-5900 ccw(c8878.12,-5728.51) 9049.61,-5728.51 ; 8878.12,-5.51 cw(c8878.12,-177) 9049.61,-177 ; 9049.63,-5728.51 9049.63,-166.23

## Other copper
Top Layer:
  rectangle: 7785,-725.51 8040,-470.51
  text "VERSION  3" at 5495,-162 h180

## Silkscreen, mask and mechanical layers (free items; w line width, h text height)
Top Overlay:
  text "SIM900" at 7824,-190 h70
  text "FUSE 250mA" at 915,-265.58 h55.12
  text "12V" at 575,-710.51 h90
  text "GND 12" at 575,-920.51 h90
  text "24V" at 575,-1115.51 h90
  text "GND 24" at 575,-1306 h90
  text "PLC TX" at 575,-1710.51 h90
  text "PLC RX" at 575,-1910.51 h90
  text "GND" at 575,-2110.51 h90
  text "PHONE" at 575,-2315.51 h90
  text "INTERCOM" at 976,-2425.53 h50
  text "RECORD" at 1401,-2425.53 h50
  text "CALL" at 1856,-2425.51 h50
  text "BUSY" at 2268,-2425.44 h50
  text "POWER" at 2661,-2425.53 h50
  text "PHONE" at 575,-2510.51 h90
  text "RING" at 575,-2710.51 h95
  text "TIP" at 570,-2910.51 h95
  text "GSM ANTEN" at 8650,-2965.51 h55.12
  text "REMOTE" at 570,-3133 h80
  text "GND" at 570,-3335 h90
  text "SIM CARD" at 7960,-3500.51 h59.06
  text "OUT 1" at 570,-3930.51 h90
  text "OUT 2" at 570,-4130.51 h90
  text "INPUT 1" at 570,-4340.51 h90
  text "MICRO SD" at 8545,-4375.51 h59.06
  text "INPUT 2" at 570,-4530.51 h90
  text "INPUT 3" at 570,-4740.51 h90
  text "Azaransystem Technology" at 4997,-4803.51 h177.17
  text "www.azaransystem.com" at 5008,-4926.51 h98.43
  text "INPUT 4" at 570,-4935.51 h90
  text "GND" at 592,-5133 h90
  text "SOUND" at 590,-5328 h80
  text "DEBUGGER" at 8562,-5425.51 h59.06 r90
  text "J-LINK" at 1050,-5474.69 h78.74
  text "ISP" at 2445,-5475.51 h78.74
  text "BOOT0" at 5160,-5530.66 h78.74
  text "RESET" at 5810,-5530.51 h78.74
  text "TEST" at 7095,-5530.51 h78.74
  text "POWER" at 7700,-5530.66 h78.74
  text "LEARN" at 6430,-5531.49 h78.74
  text "SOUND" at 3480,-5585.51 h78.74
  text "GSM UPDATE" at 3930,-5585.51 h78.74